# EAGLE board enclosure_controller_esp32 (EAGLE 9.6.2)
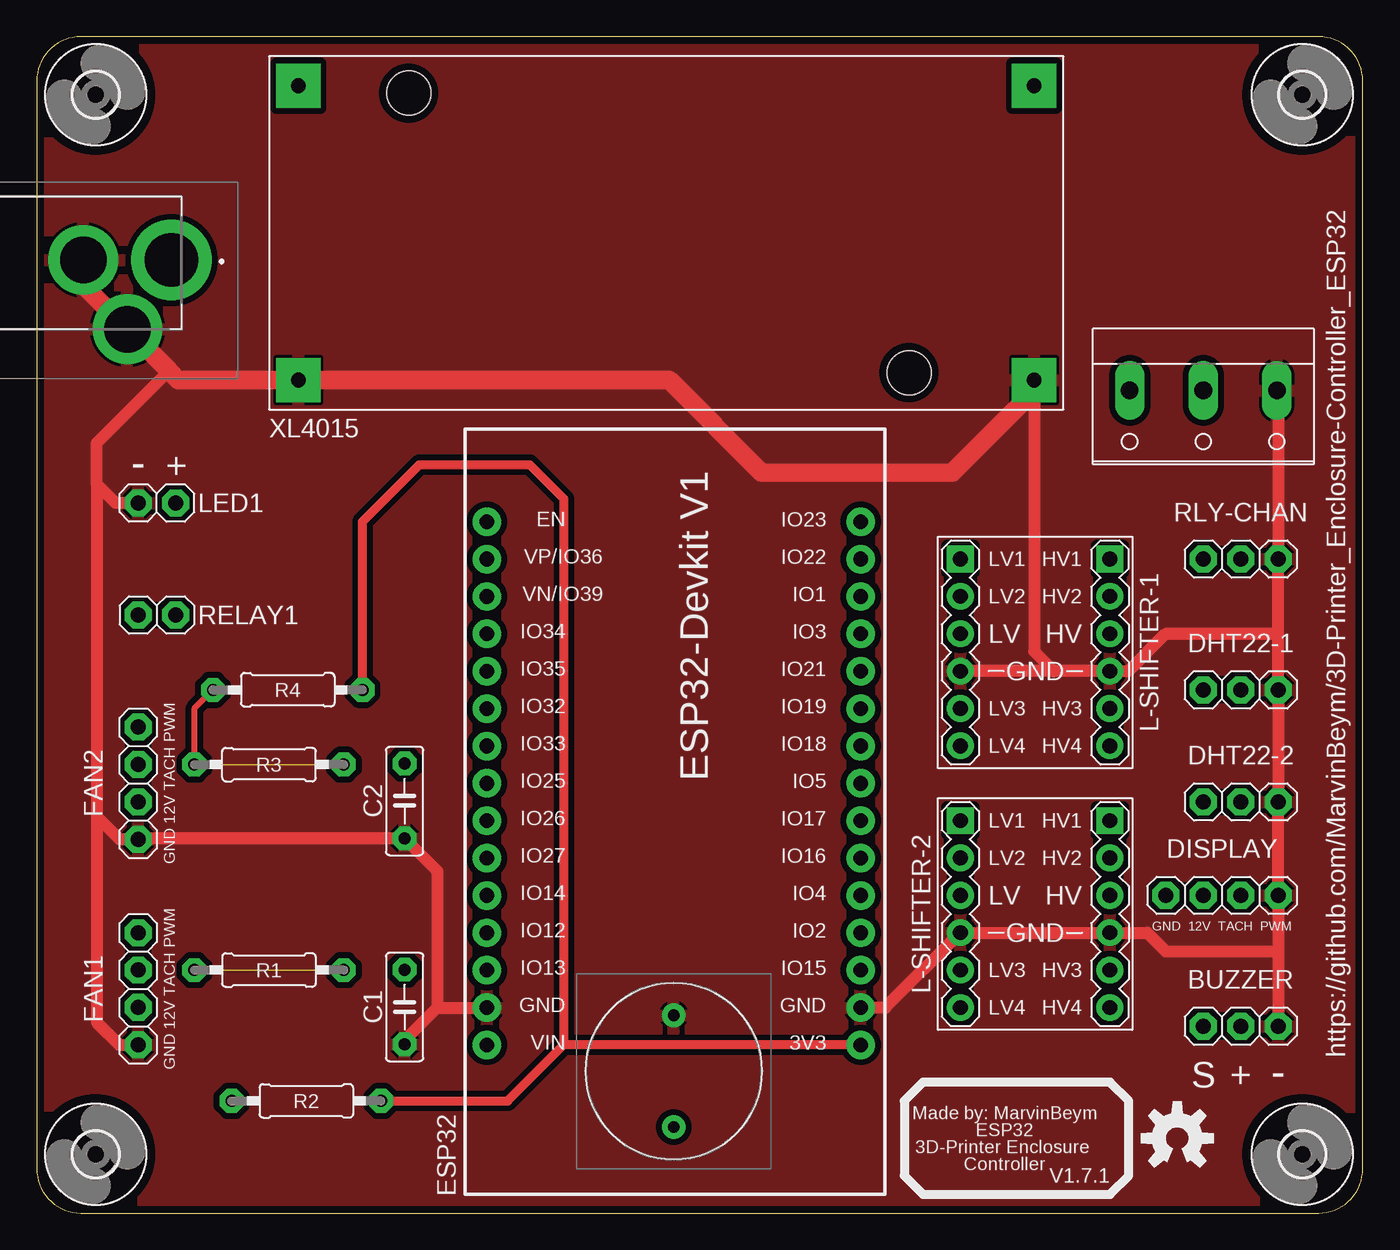
[diagram p0: board, top side]
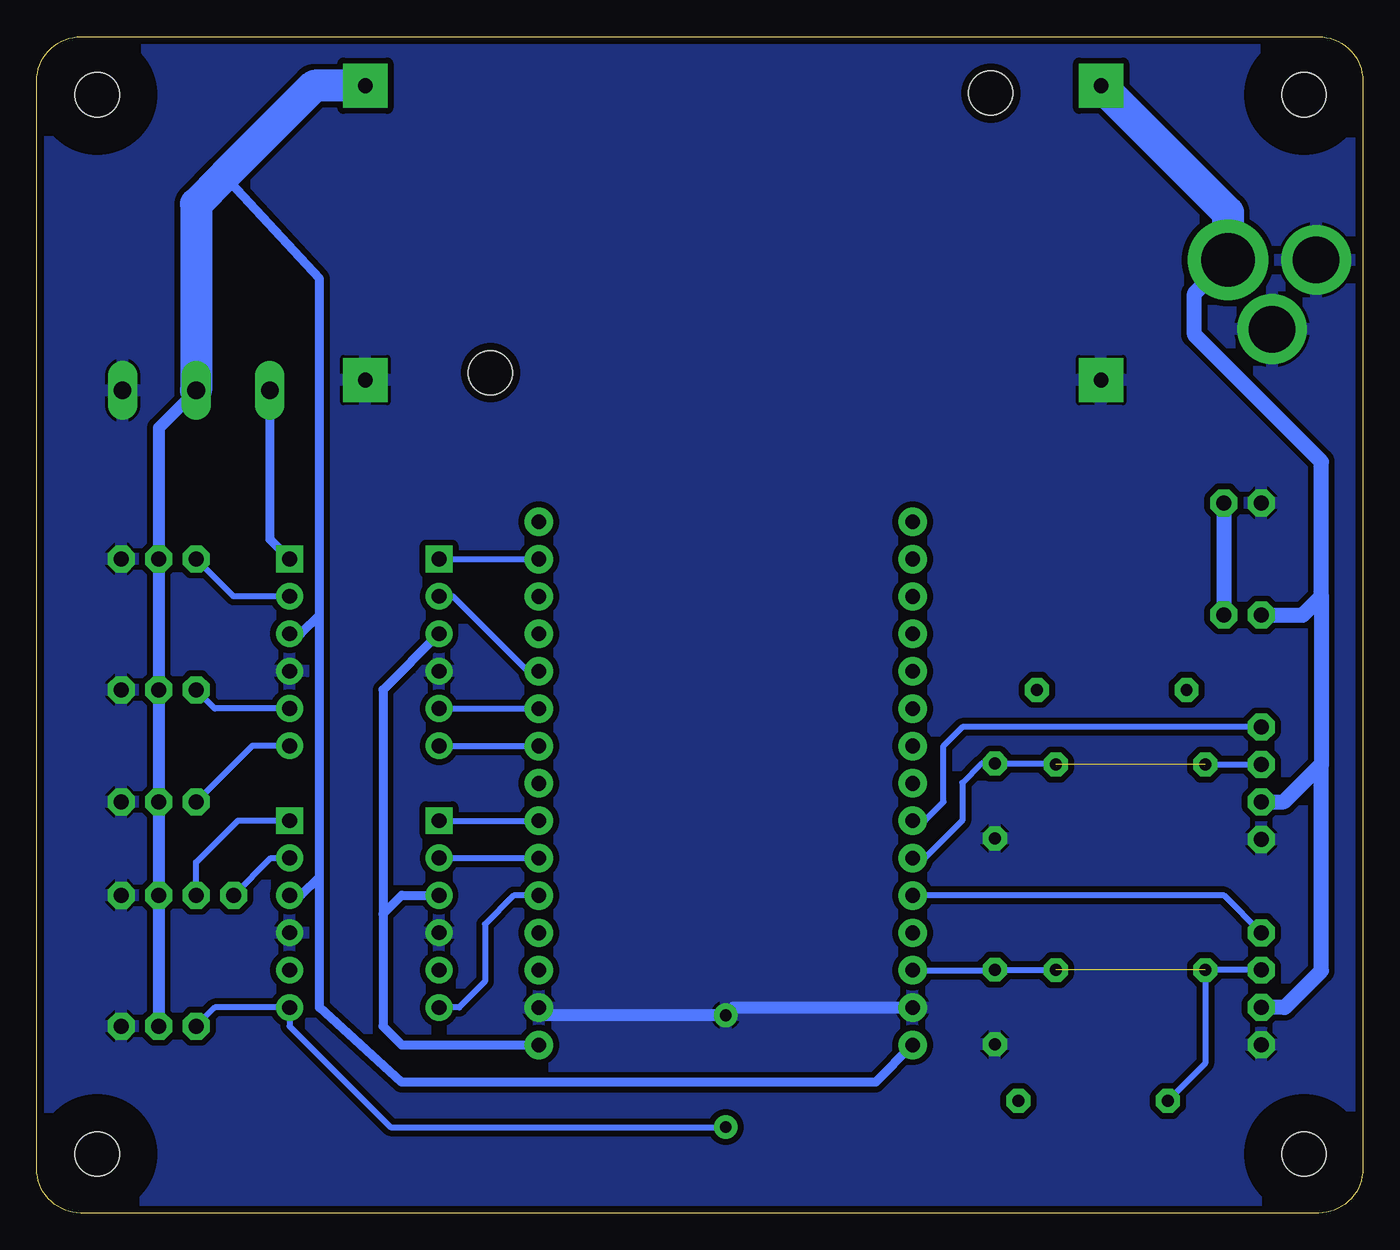
[diagram p1: board, bottom side, seen from below]

Size 90.11 x 79.94 mm. Coordinates in mm from the lower left corner, seen from the top.
Outline: 87.11,79.94 3,79.94 arc90 0,76.94 0,3 arc90 3,0 87.11,0 arc90 90.11,3 90.11,76.94 arc90 87.11,79.94
Copper layers (1*16): Top 0.035mm / dielectric 1.5mm / Bottom 0.035mm
Design rules "default *": minimum track width 6mil, minimum drill 0.35mm, track to track 0.4mm, track to pad 6mil, pad to pad 6mil, via to via 6mil, smd to smd 6mil, copper to edge 0.5mm, drill to drill 6mil, minimum pad ring 16mil, minimum via ring 8mil, stop-mask expansion 4mil, vias tented up to drill 0mil, thermal gap 8mil
Net classes: 0 default: width 0.4 mm, drill 0.025 mm, clearance 0.4 mm; 1 Power: width 0.4 mm, drill 0.025 mm, clearance 0.4 mm; 2 signals: width 0.4 mm, drill 1 mm, clearance 0.4 mm

## Footprints (pad centres in the part's own frame; a part is rotated, then mirrored left to right if it is on the bottom)
1X03/OCT = drill 1.016 octagon: 1 -2.54,0; 2 0,0; 3 2.54,0
C050-025X075 = drill 0.813 octagon: 1 -2.54,0; 2 2.54,0
DC0055A25 = drill 3.64 pad 5.46: 1 0,0 | drill 3.16 pad 4.74: 2 -6,0; 3 -3,-4.7
1X04/OCT = drill 1.016 octagon: 1 -3.81,0; 2 -1.27,0; 3 1.27,0; 4 3.81,0
ESP32-DEVKITV1 = drill 1 pad 1.93: 3V3 -16.52,-12.27; D1 13.96,-12.27; D2 -8.9,-12.27; D3 11.42,-12.27; D4 -6.36,-12.27; D5 1.26,-12.27; D12 -8.9,13.135; D13 -11.44,13.135; D14 -6.36,13.135; D15 -11.44,-12.27; D16 -3.82,-12.27; D17 -1.28,-12.27; D18 3.8,-12.27; D19 6.34,-12.27; D21 8.88,-12.27; D22 16.5,-12.27; D23 19.04,-12.27; D25 1.26,13.135; D26 -1.28,13.135; D27 -3.82,13.135; D32 6.34,13.135; D33 3.8,13.135; D34 11.42,13.135; D35 8.88,13.135; D36 16.5,13.135; D39 13.96,13.135; EN 19.04,13.135; GND@1 -13.98,13.135; GND@2 -13.98,-12.27; VIN -16.52,13.135
LEVEL-SHIFTER-4CH = drill 1 square: J1.1 -5.08,6.35; J2.1 5.08,6.35 | drill 1: J1.2 -5.08,3.81; J1.3 -5.08,1.27; J1.4 -5.08,-1.27; J1.5 -5.08,-3.81; J1.6 -5.08,-6.35; J2.2 5.08,3.81; J2.3 5.08,1.27; J2.4 5.08,-1.27; J2.5 5.08,-3.81; J2.6 5.08,-6.35
1X02/OCT = drill 1.016 octagon: 1 -1.27,0; 2 1.27,0
W237-103 = drill 1.194 long: 1 -5,-1.29; 2 0,-1.29; 3 5,-1.29
TMB12A05 = drill 0.8 pad 1.3: 1 0,0; 2 0,7.6
0207/10 = drill 0.813 octagon: 1 -5.08,0; 2 5.08,0
3,0 = hole 3: 0,0
XL4015 = drill 1 pad 3 square: IN+ 2,22; IN- 2,2; OUT+ 52,22; OUT- 52,2 | hole 3: 9.5,21.5; 43.5,2.5

## Placement (x,y rotation side)
BUZZER  [1X03/OCT]  81.82,12.7 0 top
C1  100pF  [C050-025X075]  25,14 270 top
C2  100pF  [C050-025X075]  25,28 90 top
DC-JACK  DC-005-5A-2.5  [DC0055A25]  9.16,64.77 0 top
DHT22-1  [1X03/OCT]  81.82,35.56 0 top
DHT22-2  [1X03/OCT]  81.82,27.94 0 top
DISPLAY  [1X04/OCT]  80.55,21.59 0 top
ESP32  ESP32DEVKITV1  [ESP32-DEVKITV1]  43.72,27.94 90 top
FAN1  [1X04/OCT]  6.89,15.24 90 top
FAN2  [1X04/OCT]  6.89,29.21 90 top
L-SHIFTER-1  LEVEL-SHIFTER-4CH  [LEVEL-SHIFTER-4CH]  67.85,38.1 0 top
L-SHIFTER-2  LEVEL-SHIFTER-4CH  [LEVEL-SHIFTER-4CH]  67.85,20.32 0 top
LED1  [1X02/OCT]  8.16,48.26 180 top
LED2  LED2-ADR  [W237-103]  79.28,54.61 180 top
LOGO1  OSHW-LOGOM  [OSHW-LOGO-M]  77.5,5.08 0 top
LS1  TMB12A05  [TMB12A05]  43.29,5.84 0 top
R1  3.3k  [0207/10]  15.78,16.51 180 top
R2  10k  [0207/10]  18.32,7.62 180 top
R3  3.3k  [0207/10]  15.78,30.48 0 top
R4  10k  [0207/10]  17.05,35.56 180 top
RELAY1  [1X02/OCT]  8.16,40.64 0 top
RLY-CHAN  [1X03/OCT]  81.82,44.45 0 top
U$1  [3,0]  4,76 0 top
U$2  [3,0]  4,4 0 top
U$3  [3,0]  86,76 0 top
U$4  [3,0]  86,4 0 top
XL4015  XL4015  [XL4015]  15.78,54.61 0 top

## Library data of the parts
BUZZER DHT22-1 DHT22-2 DISPLAY FAN1 FAN2 LED1 RELAY1 RLY-CHAN = pinhead_v2
C1 C2 = rcl; SPICEPREFIX: C
DC-JACK = DC-005-5A-2.5; ARROW_PART_NUMBER: DC-005-5A-2.5; DESCRIPTION: Power Connectors Through Hole RoHS; HEIGHT: 11mm; MANUFACTURER_NAME: XKB Enterprise; MANUFACTURER_PART_NUMBER: DC-005-5A-2.5
ESP32 = ESP32-DEVKITV1
L-SHIFTER-1 L-SHIFTER-2 = diy-modules
LED2 = con-wago-500_mod; MPN: 237-103; OC_FARNELL: unknown; OC_NEWARK: 18M7116
LOGO1 = SparkFun-Aesthetics
LS1 = TMB12A05; ARROW_PART_NUMBER: TMB12A05; DESCRIPTION: 12*9.5 Buzzers RoHS; HEIGHT: 9.5mm; MANUFACTURER_NAME: Jiangsu Huaneng Elec; MANUFACTURER_PART_NUMBER: TMB12A05
R1-R4 = rcl; SPICEPREFIX: R
U$1-U$4 = holes
XL4015 = XL4015

## Nets
3.3V: ESP32.3V3 L-SHIFTER-1.J1.3 L-SHIFTER-2.J1.3 R2.1 R4.1
5V [Power]: BUZZER.2 DHT22-1.2 DHT22-2.2 DISPLAY.3 ESP32.VIN L-SHIFTER-1.J2.3 L-SHIFTER-2.J2.3 LED2.2 RLY-CHAN.2 XL4015.OUT+
12V [Power]: DC-JACK.1 FAN1.2 FAN2.2 RELAY1.1 XL4015.IN+
GND: BUZZER.3 C1.2 C2.1 DC-JACK.2 DC-JACK.3 DHT22-1.3 DHT22-2.3 DISPLAY.4 ESP32.GND@1 ESP32.GND@2 FAN1.1 FAN2.1 L-SHIFTER-1.J1.4 L-SHIFTER-1.J2.4 L-SHIFTER-2.J1.4 L-SHIFTER-2.J2.4 LED1.2 LED2.1 LS1.2 RLY-CHAN.3 XL4015.IN- XL4015.OUT-
HV_BUZZ [signals]: BUZZER.1 L-SHIFTER-2.J2.6 LS1.1
HV_DHT-1 [signals]: DHT22-1.1 L-SHIFTER-1.J2.5
HV_DHT-2 [signals]: DHT22-2.1 L-SHIFTER-1.J2.6
HV_DSP-RX [signals]: DISPLAY.1 L-SHIFTER-2.J2.2
HV_DSP-TX [signals]: DISPLAY.2 L-SHIFTER-2.J2.1
HV_LED-ADR [signals]: L-SHIFTER-1.J2.1 LED2.3
HV_RLY-CHAN [signals]: L-SHIFTER-1.J2.2 RLY-CHAN.1
LV_BUZZ [signals]: ESP32.D4 L-SHIFTER-2.J1.6
LV_DHT-1 [signals]: ESP32.D19 L-SHIFTER-1.J1.5
LV_DHT-2 [signals]: ESP32.D18 L-SHIFTER-1.J1.6
LV_DSP-RX [signals]: ESP32.D16 L-SHIFTER-2.J1.2
LV_DSP-TX [signals]: ESP32.D17 L-SHIFTER-2.J1.1
LV_LED-ADR [signals]: ESP32.D22 L-SHIFTER-1.J1.1
LV_RLY-CHAN [signals]: ESP32.D21 L-SHIFTER-1.J1.2
PWM1: ESP32.D14 FAN1.4
PWM2: ESP32.D26 FAN2.4
RLY1: LED1.1 RELAY1.2
TACH1: C1.1 ESP32.D13 FAN1.3 R1.1 R1.2 R2.2
TACH2: C2.2 ESP32.D27 FAN2.3 R3.1 R3.2 R4.2

## Tracks (layer width: path | path; a pad name or v marks a point on that pad's centre or on a via)
3.3V
  Top 0.61: R4.1 22.13,46.99 26,50.86 33.5,50.86 35.83,48.53 35.83,11.45 35.8,11.42 | 35.8,11.42 32,7.62 R2.1 | ESP32.3V3 35.8,11.42
  Bottom 0.61: L-SHIFTER-1.J1.3 66.58,35.56 66.58,20.32 | 66.58,20.32 65.31,21.59 L-SHIFTER-2.J1.3 | 66.58,20.32 66.58,12.7 65.3,11.42 ESP32.3V3
5V
  Bottom 0.61: ESP32.VIN 33.12,8.89 65.31,8.89 70.9,13.97 70.9,22.86 | 70.9,22.86 70.9,40.64 | 70.9,40.64 70.9,63.5 77.38,70.48 | L-SHIFTER-2.J2.3 72.17,21.59 70.9,22.86 | L-SHIFTER-1.J2.3 72.17,39.37 70.9,40.64
  Bottom 0.813: LED2.2 81.82,53.36 RLY-CHAN.2 DHT22-1.2 DHT22-2.2 DISPLAY.3 BUZZER.2
  Bottom 2.159: XL4015.OUT+ 71.25,76.61 77.38,70.48 79.28,68.58 LED2.2
12V
  Bottom 1.016: FAN1.2 5.3,13.97 2.81,16.46 2.81,30.48 | 2.81,41.91 2.81,30.48 | FAN2.2 5.35,27.94 2.81,30.48 | RELAY1.1 4.08,40.64 2.81,41.91 | DC-JACK.1 11.43,62.5 11.43,59.69 2.81,51.07 2.81,41.91
  Bottom 2.159: XL4015.IN+ 9.16,67.99 DC-JACK.1
GND
  Top 0.813: LED2.1 84.36,55.82 RLY-CHAN.3 84.36,39.37 | ESP32.GND@2 57.69,13.97 L-SHIFTER-2.J1.4 L-SHIFTER-2.J2.4 75.47,19.05 76.74,17.78 84.36,17.78 | 84.36,39.37 DHT22-1.3 DHT22-2.3 DISPLAY.4 84.36,17.78 | 84.36,39.37 76.74,39.37 74.2,36.83 L-SHIFTER-1.J2.4 69.12,36.83 | 69.12,36.83 L-SHIFTER-1.J1.4 | XL4015.OUT- 67.78,38.17 69.12,36.83 | 27.21,13.96 ESP32.GND@1 | 27.21,13.96 27.21,23.25 C2.1 6.95,25.46 FAN2.1 5.62,25.4 4.08,26.94 | C1.2 25,11.75 27.21,13.96 | 4.08,49.53 4.08,26.94 | 84.36,17.78 BUZZER.3 | 4.08,26.94 4.08,12.97 5.62,11.43 FAN1.1 | LED1.2 5.35,48.26 4.08,49.53 | 8.98,57.24 4.08,52.34 4.08,49.53
  Top 1.27: XL4015.OUT- 67.78,55.88 62.24,50.34 49.26,50.34 42.99,56.61 XL4015.IN- 9.62,56.61 8.98,57.24 DC-JACK.3 3.16,63.07 DC-JACK.2
  Bottom 0.813: ESP32.GND@1 42.77,13.96 LS1.2 55.47,13.44 ESP32.GND@2
  pour Bottom: -8.89,82.55 -8.89,-6.35 96.52,-6.35 96.52,87.63 -8.89,87.63
  pour Top: -15.24,93.98 -15.24,-13.97 109.22,-13.97 109.22,96.52 -15.24,96.52
HV_BUZZ
  Bottom 0.406: BUZZER.1 78.01,13.97 L-SHIFTER-2.J2.6 72.93,12.7 66.07,5.84 LS1.1
HV_DHT-1
  Bottom 0.4: L-SHIFTER-1.J2.5 78.01,34.29 DHT22-1.1
HV_DHT-2
  Bottom 0.4: L-SHIFTER-1.J2.6 75.47,31.75 DHT22-2.1
HV_DSP-RX
  Bottom 0.406: DISPLAY.1 74.2,24.13 L-SHIFTER-2.J2.2
HV_DSP-TX
  Bottom 0.406: DISPLAY.2 79.28,23.83 76.44,26.67 L-SHIFTER-2.J2.1
HV_LED-ADR
  Bottom 0.61: LED2.3 74.28,45.8 L-SHIFTER-1.J2.1
HV_RLY-CHAN
  Bottom 0.4: L-SHIFTER-1.J2.2 76.74,41.91 RLY-CHAN.1
LV_BUZZ
  Bottom 0.4: ESP32.D4 57.7,21.58 59.65,19.63 59.65,15.73
  Bottom 0.406: 59.65,15.73 61.41,13.97 L-SHIFTER-2.J1.6
LV_DHT-1
  Bottom 0.406: L-SHIFTER-1.J1.5 ESP32.D19
LV_DHT-2
  Bottom 0.406: L-SHIFTER-1.J1.6 ESP32.D18
LV_DSP-RX
  Bottom 0.406: L-SHIFTER-2.J1.2 ESP32.D16
LV_DSP-TX
  Bottom 0.406: L-SHIFTER-2.J1.1 ESP32.D17
LV_LED-ADR
  Bottom 0.406: L-SHIFTER-1.J1.1 ESP32.D22
LV_RLY-CHAN
  Bottom 0.406: ESP32.D21 56.08,36.73 56.65,36.73 61.83,41.91 L-SHIFTER-1.J1.2
PWM1
  Bottom 0.406: FAN1.4 9.42,21.58 ESP32.D14
PWM2
  Bottom 0.406: FAN2.4 27.21,33.02 28.48,31.75 28.48,27.94 29.75,26.67 30.57,26.67 ESP32.D26
RLY1
  Bottom 1.016: LED1.1 RELAY1.2
TACH1  (1 unrouted)
  Bottom 0.406: ESP32.D13 25.04,16.5 C1.1 20.89,16.54 R1.1 | FAN1.3 R1.2 10.7,10.16 R2.2
TACH2  (1 unrouted)
  Top 0.406: R4.2 10.7,34.29 R3.1
  Bottom 0.406: 30.36,23.89 ESP32.D27 29.76,24.12 27.21,26.67 27.21,29.23 25.9,30.54 C2.2 20.92,30.54 R3.2 | R3.1 FAN2.3

## Text on the board
tNames: - | + | https://github.com/MarvinBeym/3D-Printer_Enclosure-Controller_ESP32 | GND 12V TACH PWM | GND 12V TACH PWM | GND 12V TACH PWM | - | S | + | Made by: MarvinBeym / ESP32 / 3D-Printer Enclosure / Controller | V1.7.1